# EAGLE board AHNS_MCU_B0 (EAGLE 5.08)
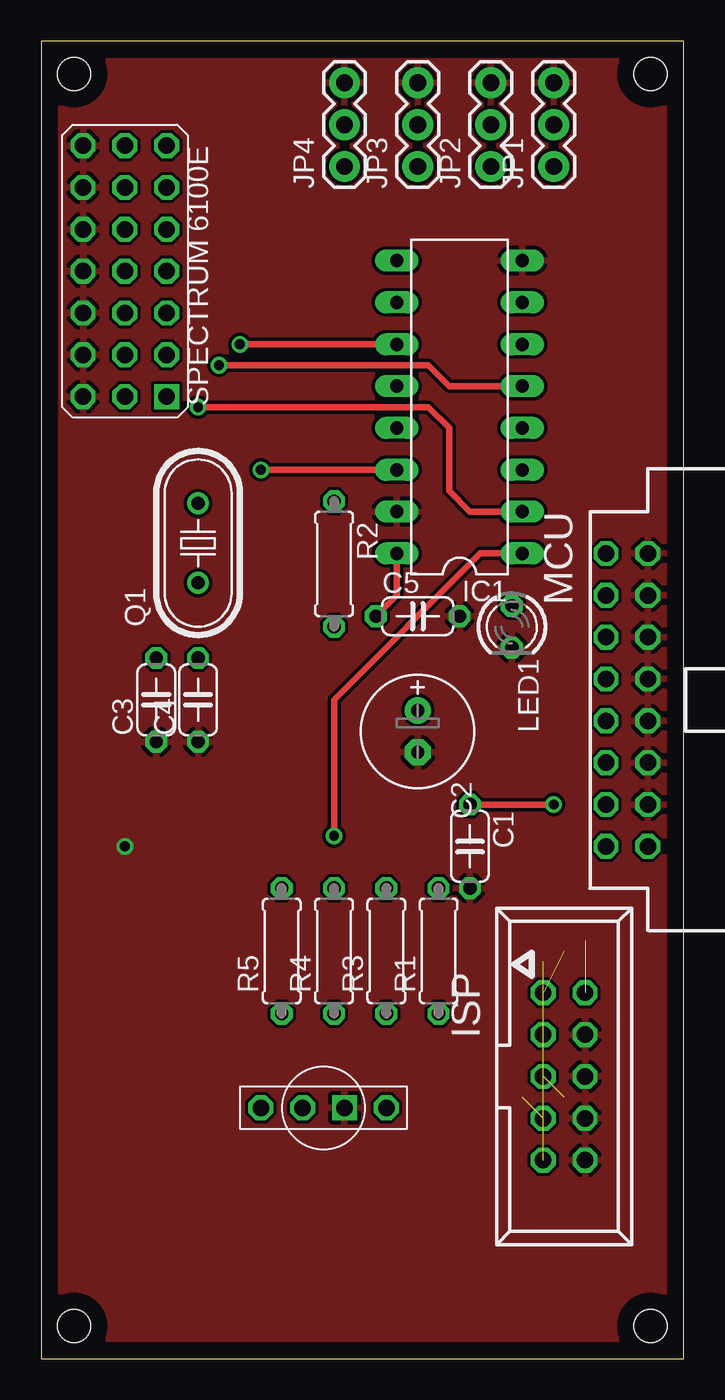
[diagram p0: board, top side]
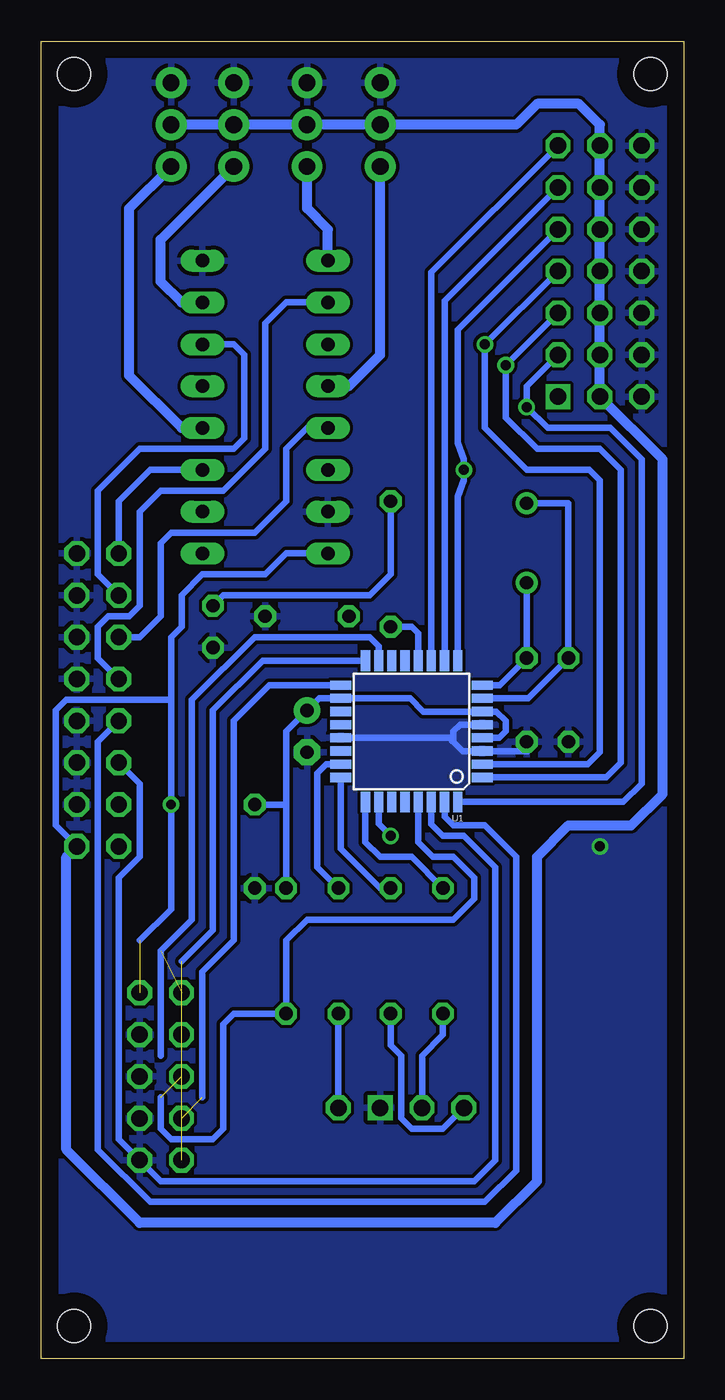
[diagram p1: board, bottom side, seen from below]

Size 39 x 80 mm. Coordinates in mm from the lower left corner, seen from the top.
Outline: 0,0 39,0 39,80 0,80 0,0
Copper layers (1*16): Top 0.035mm / dielectric 1.5mm / Bottom 0.035mm
Design rules "default": minimum track width 10mil, minimum drill 24mil, track to track 8mil, track to pad 8mil, pad to pad 8mil, via to via 8mil, smd to smd 8mil, copper to edge 40mil, drill to drill 8mil, minimum pad ring 10mil, minimum via ring 8mil, stop-mask expansion 4mil, vias tented up to drill 0mil, thermal gap 10mil
Holes 2 mm at 2,78 2,2 37,2 37,78

## Footprints (pad centres in the part's own frame; a part is rotated, then mirrored left to right if it is on the bottom)
C050-024X044 = drill 0.813 octagon: 1 -2.54,0; 2 2.54,0
E2,5-7 = drill 0.813 pad 1.6 round: + -1.27,0 | drill 0.813 pad 1.6 octagon: - 1.27,0
DIL16 = drill 0.813 long: 1 -8.89,-3.81; 2 -6.35,-3.81; 3 -3.81,-3.81; 4 -1.27,-3.81; 5 1.27,-3.81; 6 3.81,-3.81; 7 6.35,-3.81; 8 8.89,-3.81; 9 8.89,3.81; 10 6.35,3.81; 11 3.81,3.81; 12 1.27,3.81; 13 -1.27,3.81; 14 -3.81,3.81; 15 -6.35,3.81; 16 -8.89,3.81
057-010-1 = drill 1 octagon: 1 -5.08,-1.27; 2 -5.08,1.27; 3 -2.54,-1.27; 4 -2.54,1.27; 5 0,-1.27; 6 0,1.27; 7 2.54,-1.27; 8 2.54,1.27; 9 5.08,-1.27; 10 5.08,1.27
1X03 = drill 1.016 pad 1.88 round: 1 0,0; 2 2.54,0; 3 5.08,0
LED3MM = drill 0.813 octagon: A -1.27,0; K 1.27,0
057-016-0 = drill 1 octagon: 1 -8.89,-5.08; 2 -8.89,-2.54; 3 -6.35,-5.08; 4 -6.35,-2.54; 5 -3.81,-5.08; 6 -3.81,-2.54; 7 -1.27,-5.08; 8 -1.27,-2.54; 9 1.27,-5.08; 10 1.27,-2.54; 11 3.81,-5.08; 12 3.81,-2.54; 13 6.35,-5.08; 14 6.35,-2.54; 15 8.89,-5.08; 16 8.89,-2.54
HC49U70 = drill 0.813 round: 1 -2.413,0; 2 2.413,0
0207/7 = drill 0.813 octagon: 1 -3.81,0; 2 3.81,0
TQFP32-08 = smd 1.27 x 0.559: 1 -4.293,2.8; 2 -4.293,2; 3 -4.293,1.2; 4 -4.293,0.4; 5 -4.293,-0.4; 6 -4.293,-1.2; 7 -4.293,-2; 8 -4.293,-2.8; 17 4.293,-2.8; 18 4.293,-2; 19 4.293,-1.2; 20 4.293,-0.4; 21 4.293,0.4; 22 4.293,1.2; 23 4.293,2; 24 4.293,2.8 | smd 0.559 x 1.27: 9 -2.8,-4.293; 10 -2,-4.293; 11 -1.2,-4.293; 12 -0.4,-4.293; 13 0.4,-4.293; 14 1.2,-4.293; 15 2,-4.293; 16 2.8,-4.293; 25 2.8,4.293; 26 2,4.293; 27 1.2,4.293; 28 0.4,4.293; 29 -0.4,4.293; 30 -1.2,4.293; 31 -2,4.293; 32 -2.8,4.293
SPECTRUM_6100E = drill 1 octagon: BATT_GND 2.54,7.62; BATT_VCC 0,7.62; CH1_GND 2.54,5.08; CH1_SIG -2.54,5.08; CH1_VCC 0,5.08; CH2_GND 2.54,2.54; CH2_SIG -2.54,2.54; CH2_VCC 0,2.54; CH3_GND 2.54,0; CH3_SIG -2.54,0; CH3_VCC 0,0; CH4_GND 2.54,-2.54; CH4_SIG -2.54,-2.54; CH4_VCC 0,-2.54; CH5_GND 2.54,-5.08; CH5_SIG -2.54,-5.08; CH5_VCC 0,-5.08; CH6_GND 2.54,-7.62; CH6_SIG -2.54,-7.62; CH6_VCC 0,-7.62 | drill 1 square: NC -2.54,7.62
TRI_COLOR_LED = drill 1 octagon: BLU 1.27,0; GRN 3.81,0; RED -3.81,0 | drill 1 square: CATHODE -1.27,0

## Placement (x,y rotation side)
C1  1n  [C050-024X044]  26.04,31.11 270 top
C2  10u  [E2,5-7]  22.86,38.1 270 top
C3  22p  [C050-024X044]  6.99,40.01 90 top
C4  22p  [C050-024X044]  9.53,40.01 90 top
C5  1n  [C050-024X044]  22.86,45.09 0 top
IC1  74LS157N  [DIL16]  25.4,57.78 90 top
ISP  057-010-1  [057-010-1]  31.75,17.14 270 top
JP1  [1X03]  31.11,72.39 90 top
JP2  [1X03]  27.3,72.39 90 top
JP3  [1X03]  22.86,72.39 90 top
JP4  [1X03]  18.41,72.39 90 top
LED1  [LED3MM]  28.57,44.45 270 top
MCU  057-016-0  [057-016-0]  39.37,40.01 270 top
Q1  8MHz  [HC49U70]  9.53,49.53 90 top
R1  10k  [0207/7]  24.13,24.77 90 top
R2  1k  [0207/7]  17.78,48.26 270 top
R3  1k  [0207/7]  20.95,24.77 90 top
R4  1k  [0207/7]  17.78,24.77 90 top
R5  1k  [0207/7]  14.61,24.77 90 top
U1  ATMEGA168  [TQFP32-08]  16.51,38.1 180 bottom
U$1  SPECTRUM_6100E  [SPECTRUM_6100E]  5.08,66.04 180 top
U$2  TRI_COLOR_LED  [TRI_COLOR_LED]  17.14,15.24 180 top

## Library data of the parts
C1-C5 R1-R5 = rcl
IC1 = 74xx-us
ISP MCU = con-panduit
JP1-JP4 U1 = SparkFun
LED1 = led
Q1 = crystal
U$1 U$2 = AHNS10

## Nets
FC_CH1: IC1.3 MCU.1
FC_CH2: IC1.6 MCU.3
FC_CH3: IC1.10 MCU.7
FC_CH4: IC1.13 MCU.5
GND: C1.2 C2.- C3.1 C4.1 C5.2 IC1.8 IC1.15 ISP.4 ISP.6 ISP.8 ISP.10 JP1.3 JP2.3 JP3.3 JP4.3 LED1.K MCU.2 MCU.4 MCU.6 MCU.8 MCU.10 MCU.12 MCU.14 U1.3 U1.5 U1.21 U$1.BATT_GND U$1.CH1_GND U$1.CH2_GND U$1.CH3_GND U$1.CH4_GND U$1.CH5_GND U$1.CH6_GND U$2.CATHODE
ISP_MISO: ISP.9 U1.16
ISP_MOSI: ISP.1 U1.15
ISP_SCK: ISP.7 U1.17
N$1: IC1.4 JP1.1
N$2: IC1.7 JP2.1
N$3: IC1.9 JP3.1
N$4: IC1.12 JP4.1
N$5: IC1.1 U1.26
N$6: R3.1 U$2.RED
N$7: MCU.9 U1.31
N$8: MCU.11 U1.30
N$9: R4.1 U$2.GRN
N$10: R5.1 U$2.BLU
N$11: R5.2 U1.25
N$12: R4.2 U1.24
N$13: C3.2 Q1.2 U1.7
N$14: C4.2 Q1.1 U1.8
N$15: R2.2 U1.12
N$16: LED1.A R2.1
N$17: ISP.5 R1.1 U1.29
N$18: R3.2 U1.23
RC_CH1: IC1.2 U1.32 U$1.CH1_SIG
RC_CH2: IC1.5 U1.1 U$1.CH2_SIG
RC_CH3: IC1.11 U1.2 U$1.CH3_SIG
RC_CH4: IC1.14 U1.9 U$1.CH4_SIG
RC_CH5: U1.10 U$1.CH5_SIG
RC_CH6: U1.11 U$1.CH6_SIG
VCC_5: C1.1 C2.+ C5.1 IC1.16 ISP.2 JP1.2 JP2.2 JP3.2 JP4.2 MCU.16 R1.2 U1.4 U1.6 U1.18 U$1.BATT_VCC U$1.CH1_VCC U$1.CH2_VCC U$1.CH3_VCC U$1.CH4_VCC U$1.CH5_VCC U$1.CH6_VCC

## Tracks (layer width: path | path; a pad name or v marks a point on that pad's centre or on a via)
FC_CH1
  Bottom 0.406: MCU.1 34.29,52.07 32.38,53.98 IC1.3
FC_CH2
  Bottom 0.406: MCU.3 35.56,47.62 35.56,52.7 33.02,55.24 27.3,55.24 26.67,55.88 26.67,60.96 27.3,61.59 IC1.6
FC_CH3
  Bottom 0.406: MCU.7 35.56,42.55 35.56,44.45 34.92,45.09 33.66,45.09 33.02,45.72 33.02,51.44 31.75,52.7 27.94,52.7 25.4,55.24 25.4,62.87 24.13,64.14 IC1.10
FC_CH4
  Bottom 0.406: MCU.5 33.02,43.81 31.75,45.09 31.75,49.53 31.11,50.16 26.04,50.16 24.13,52.07 24.13,55.24 22.86,56.52 IC1.13
GND  (via drill 0.6)
  Bottom 0.406: 13.97,37.47 13.4,36.9 U1.3 9.46,36.9 C4.1 | U1.5 13.57,38.5 13.97,38.1 13.97,37.47 | U1.21 14.21,37.7 13.97,37.47
  other vias: 5.08,31.11
  pour Top: 0.64,79.38 38.1,79.38 38.1,0.64 0.64,0.64
  pour Bottom: 0.64,79.38 38.1,79.38 38.1,0.64 0.64,0.64
ISP_MISO  (1 unrouted)
  Bottom 0.406: U1.16 25.55,42.39 28.57,39.37 28.57,26.04 30.48,24.13
ISP_MOSI  (1 unrouted)
  Bottom 0.406: U1.15 18.51,43.27 19.05,43.81 26.04,43.81 29.84,40.01 29.84,26.67 31.75,24.77 31.75,18.41
ISP_SCK  (1 unrouted)
  Bottom 0.406: U1.17 25.14,40.9 27.3,38.73 27.3,25.4 29.21,23.5 29.21,15.88
N$1
  Bottom 0.61: IC1.4 30.48,56.52 33.66,59.69 33.66,69.85 JP1.1
N$2
  Bottom 0.61: IC1.7 30.48,64.14 31.75,65.41 31.75,67.94 JP2.1
N$3
  Bottom 0.61: IC1.9 21.59,68.58 22.86,69.85 JP3.1
N$4
  Bottom 0.61: IC1.12 20.32,59.05 18.41,60.96 JP4.1
N$5  (via drill 0.6)
  Top 0.406: IC1.1 26.67,48.9 17.78,40.01 v17.78,31.75
  Bottom 0.406: U1.26 18.51,32.48 v17.78,31.75
N$6
  Bottom 0.406: U$2.RED R3.1
N$7
  Bottom 0.406: MCU.9 35.56,37.47 35.56,12.7 32.38,9.53 12.06,9.53 10.16,11.43 10.16,30.48 12.06,32.38 13.97,32.38 14.51,32.92 U1.31
N$8
  Bottom 0.406: MCU.11 33.02,34.92 33.02,30.48 34.29,29.21 34.29,13.34 31.75,10.79 12.7,10.79 11.43,12.06 11.43,29.84 13.34,31.75 14.61,31.75 15.31,32.45 U1.30
N$9
  Bottom 0.406: R4.1 17.78,19.05 17.14,18.41 17.14,14.61 16.51,13.97 14.61,13.97 U$2.GRN
N$10
  Bottom 0.406: U$2.BLU 15.88,18.41 14.61,19.68 R5.1
N$11
  Bottom 0.406: U1.25 19.31,31.38 18.41,30.48 16.51,30.48 R5.2
N$12
  Bottom 0.406: R4.2 18.41,28.57 20.8,30.96 U1.24
N$13
  Bottom 0.406: Q1.2 6.99,51.94 C3.2 9.43,40.1 U1.7
N$14
  Bottom 0.406: Q1.1 C4.2 11.17,40.9 U1.8
N$15
  Bottom 0.406: U1.12 16.11,44.05 16.51,44.45 R2.2
N$16
  Bottom 0.406: R2.1 17.78,47.62 19.05,46.35 27.94,46.35 LED1.A
N$17  (1 unrouted)
  Bottom 0.406: 31.75,15.88 31.75,13.97 31.11,13.34 28.57,13.34 27.94,13.97 27.94,20.32 27.3,20.95 R1.1 24.13,25.4 22.86,26.67 13.97,26.67 12.7,27.94 12.7,29.21 13.97,30.48 15.24,30.48 16.11,31.35 U1.29
N$18
  Bottom 0.406: U1.23 21.68,36.1 22.23,35.56 22.23,29.84 R3.2
N$19  (via drill 0.6)
  other vias: 13.34,53.98
RC_CH1  (via drill 0.6)
  Top 0.406: IC1.2 26.04,51.44 24.77,52.7 24.77,56.52 23.5,57.78 v9.53,57.78
  Bottom 0.406: U1.32 3.66,33.81 2.54,34.92 2.54,54.61 4.45,56.52 8.26,56.52 v9.53,57.78 9.53,59.05 U$1.CH1_SIG
RC_CH2  (via drill 0.6)
  Top 0.406: IC1.5 24.77,59.05 23.5,60.33 v10.79,60.33
  Bottom 0.406: U1.1 4.71,35.3 3.81,36.2 3.81,53.98 5.08,55.24 8.89,55.24 10.79,57.15 v10.79,60.33 U$1.CH2_SIG
RC_CH3  (via drill 0.6)
  Top 0.406: v12.06,61.59 IC1.11
  Bottom 0.406: U1.2 5.81,36.1 5.08,36.83 5.08,53.34 5.71,53.98 9.53,53.98 12.06,56.52 v12.06,61.59 U$1.CH3_SIG
RC_CH4  (1 unrouted)
  Top 0.406: 13.34,53.98 IC1.14
  Bottom 0.406: U$1.CH4_SIG 13.71,62.49 13.71,55.62 13.34,54.61 13.34,53.98 13.34,53.34 13.71,52.33 U1.9
RC_CH5
  Bottom 0.406: U1.10 14.51,64.23 U$1.CH5_SIG
RC_CH6
  Bottom 0.406: U1.11 15.31,65.97 U$1.CH6_SIG
VCC_5  (via drill 0.6)  (1 unrouted)
  Top 0.406: v31.11,33.66 C1.1 | IC1.16 21.59,46.35 C5.1
  Bottom 0.406: U1.4 11.2,37.7 10.79,38.1 10.79,38.73 11.36,39.3 U1.6 15.8,39.3 16.61,40.1 U1.18 22.13,40.1 C2.+ 24.13,38.1 24.13,33.66 | 24.13,33.66 R1.2 | C1.1 24.13,33.66 | 33.02,25.4 31.11,27.3 v31.11,33.66 31.11,40.01 | 31.11,40.01 37.47,40.01 38.1,39.37 38.1,32.38 MCU.16 | IC1.16 24.13,48.9 25.4,47.62 29.21,47.62 30.48,46.35 30.48,44.45 31.11,43.81 31.11,40.01
  Bottom 0.61: JP1.2 JP2.2 JP3.2 JP4.2 10.16,74.93 8.89,76.2 6.35,76.2 5.08,74.93 U$1.CH6_VCC U$1.CH5_VCC U$1.CH4_VCC U$1.CH3_VCC U$1.CH2_VCC U$1.CH1_VCC U$1.BATT_VCC 1.27,54.61 1.27,34.29 3.17,32.38 6.99,32.38 8.89,30.48 8.89,10.79 11.43,8.26 33.02,8.26 37.47,12.7 37.47,30.48 MCU.16